# Altium PCB Copy of 智慧景区导航.PcbDoc
Units mm, origin at the board's own origin, x right, y up, seen from the top; angles counter-clockwise.
Board outline 94.01 x 87.28 mm, 2 copper layers (Top Layer, Bottom Layer); 30 components, 29 nets, 119 pads, 12 vias.
Unrouted connection lines stored in the file: 10.
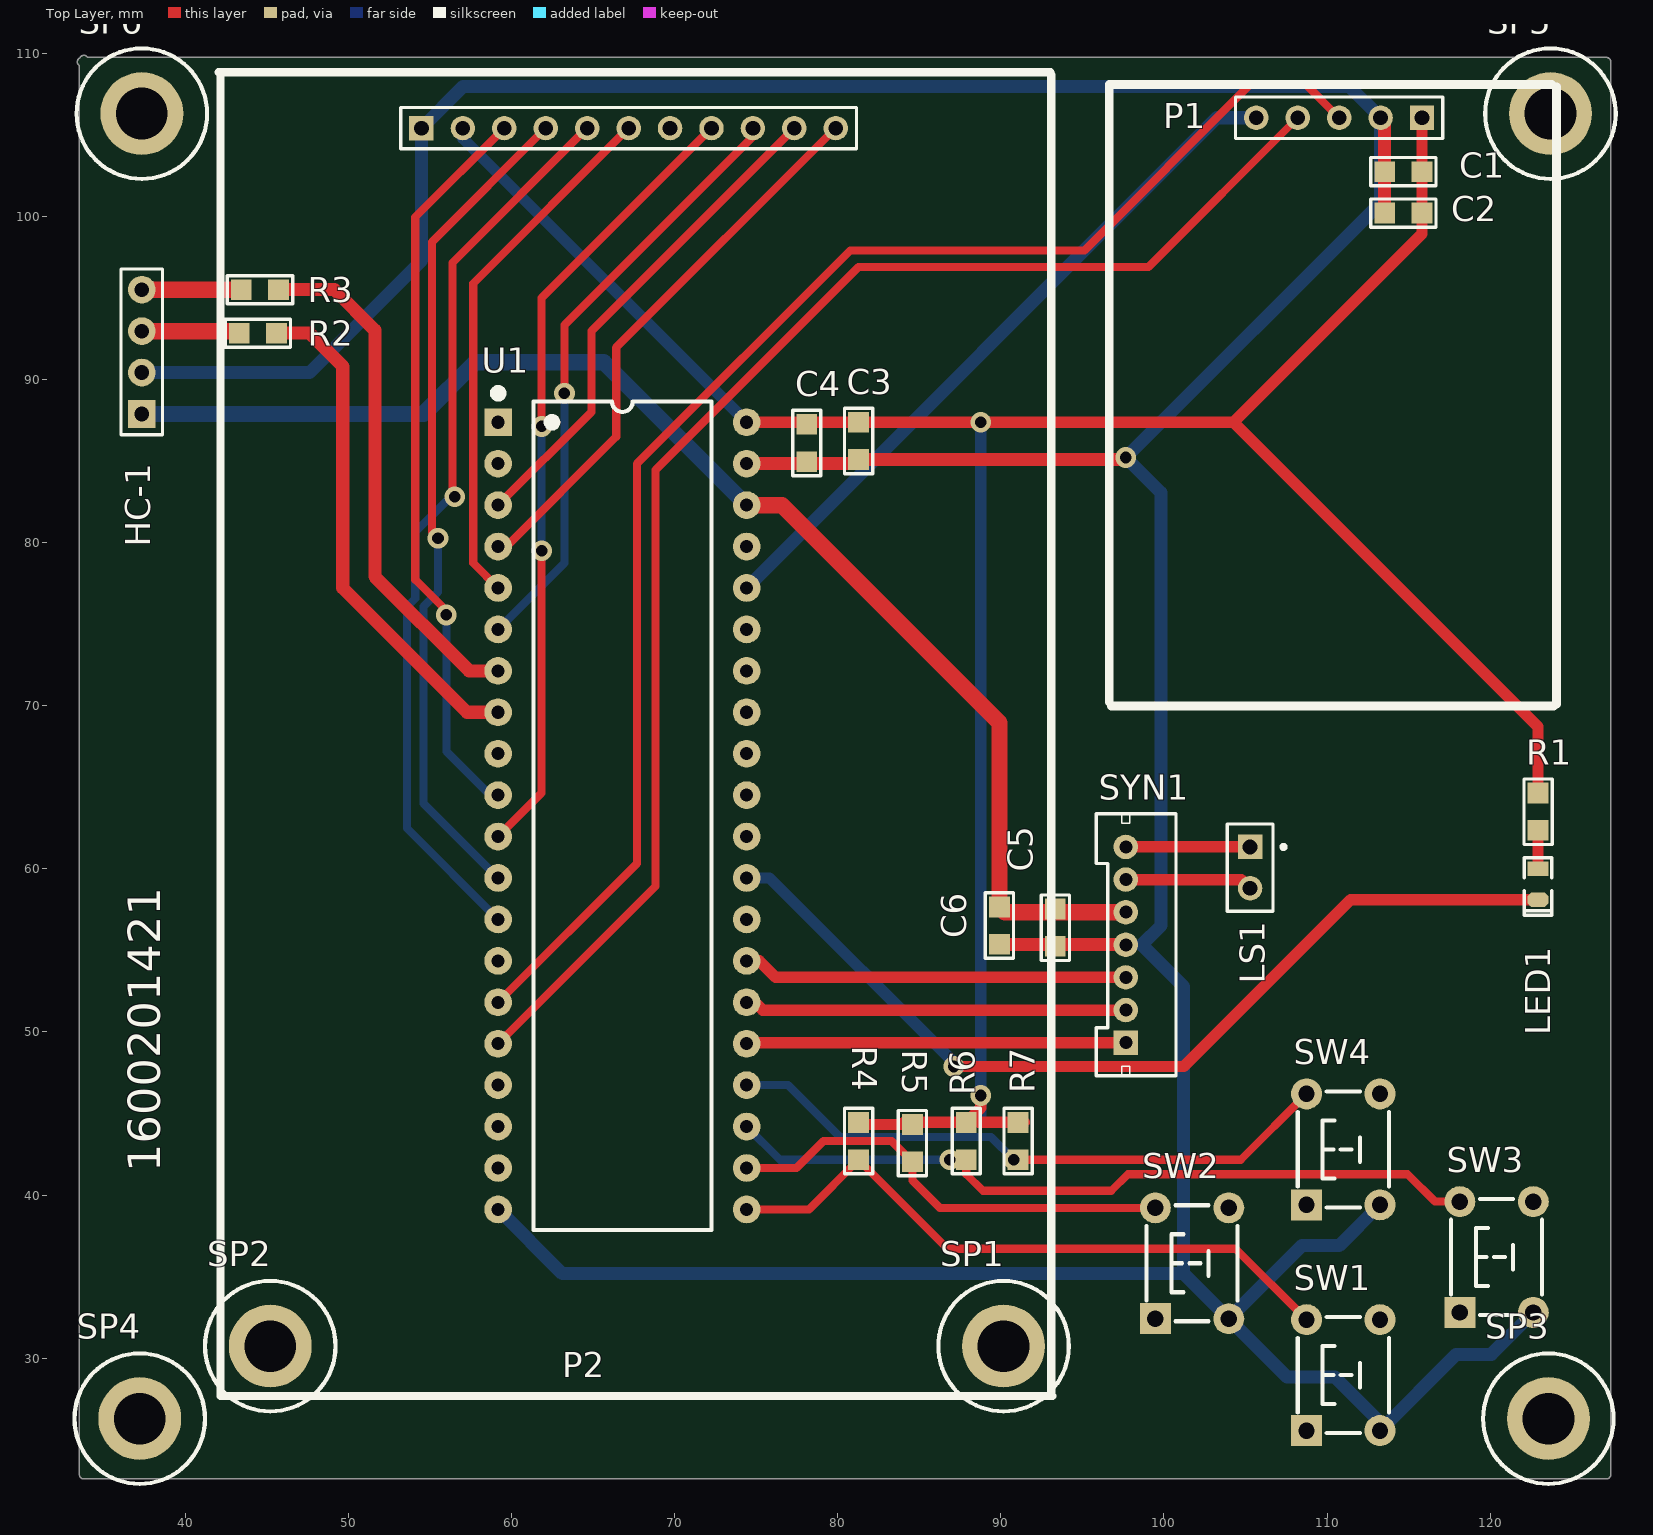
[diagram p0: Top Layer view]
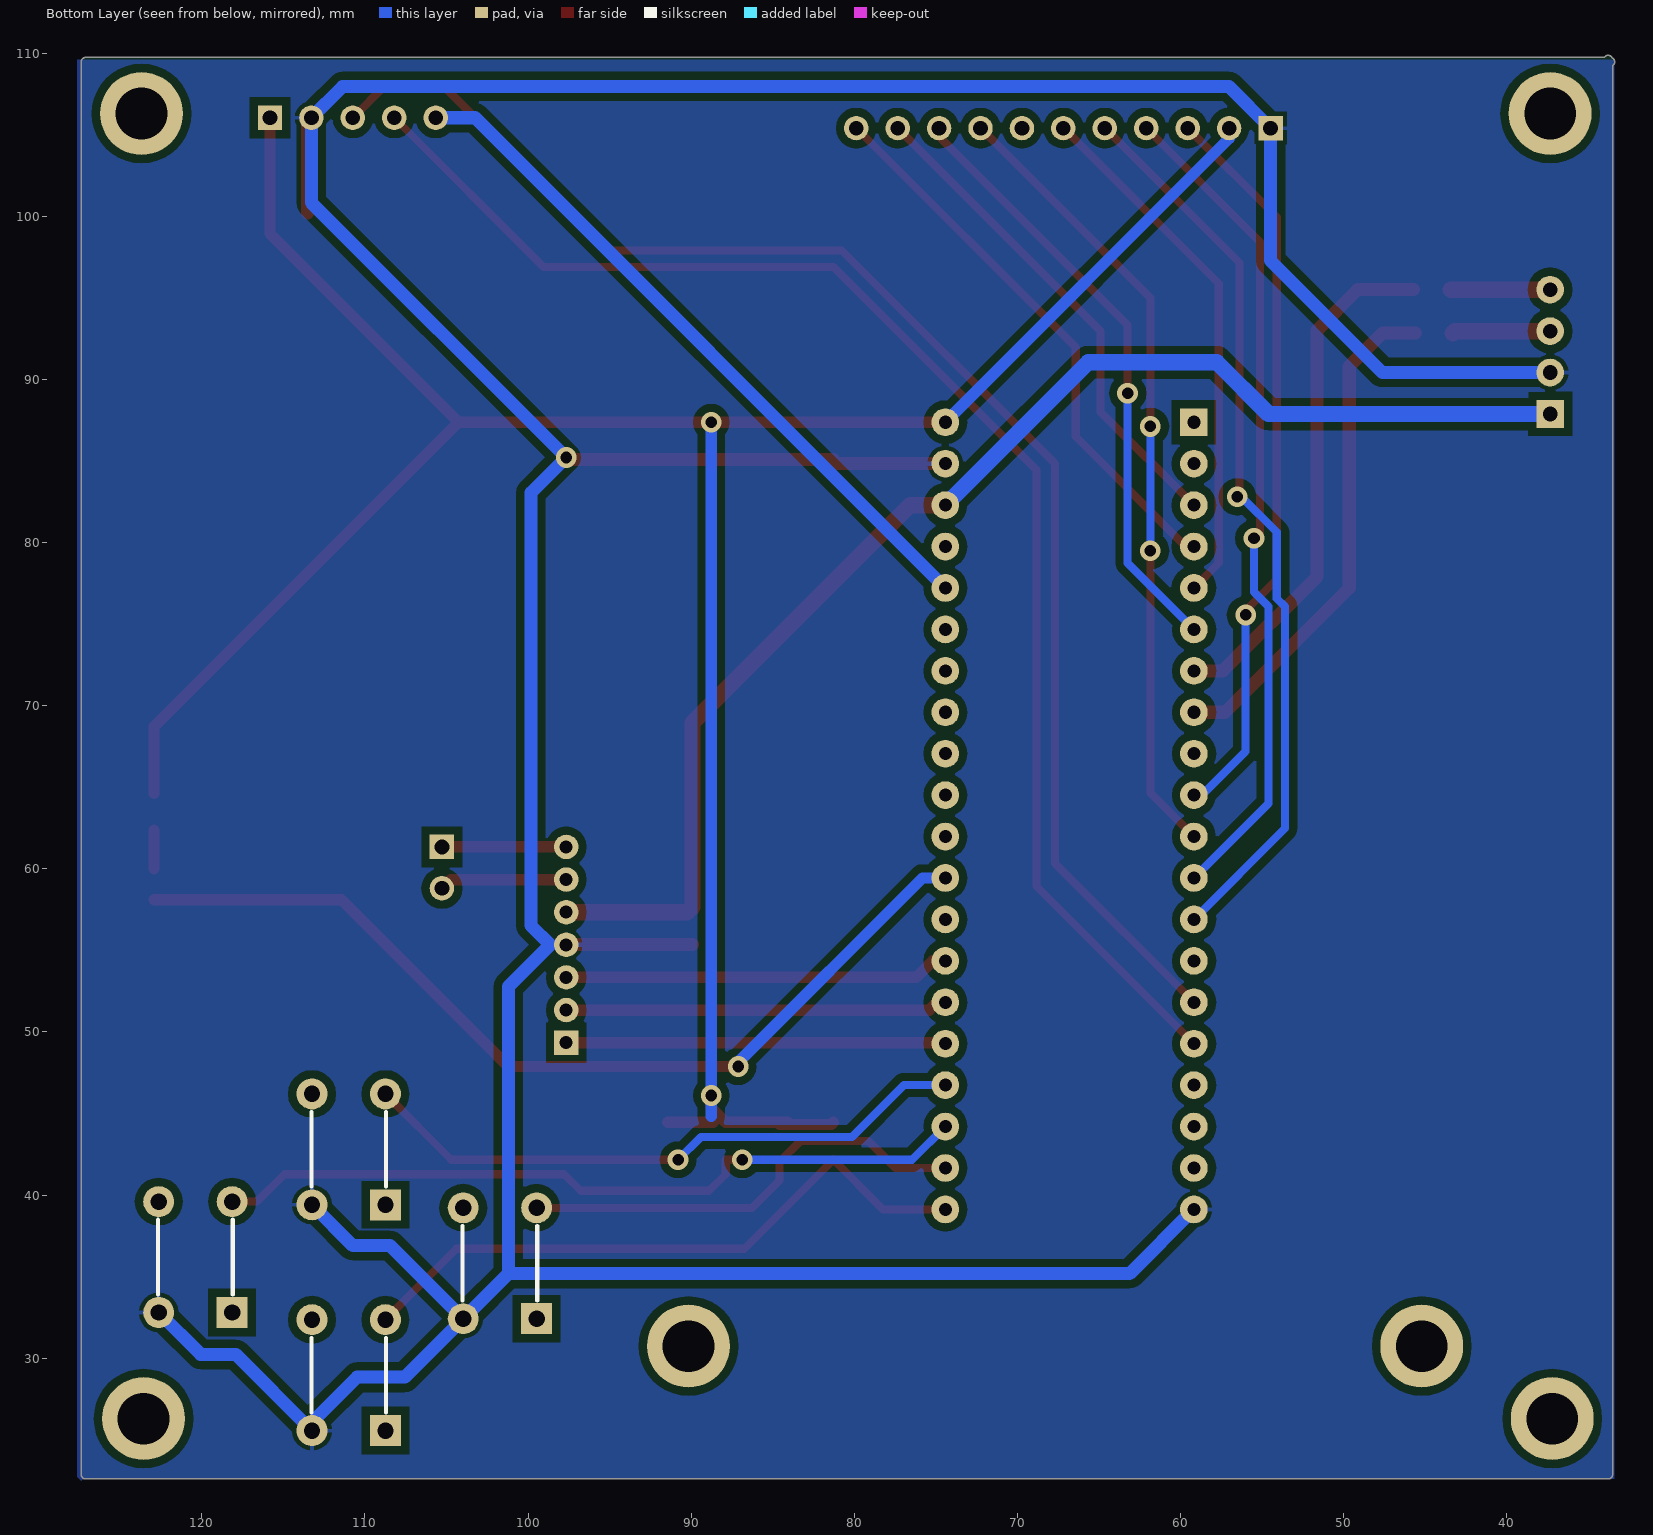
[diagram p1: Bottom Layer view, seen from below]

## Layer stack, top to bottom
Top Solder: solder mask 0.0102, Solder Resist, Dk 3.5
Top Layer: signal copper 0.0356
Dielectric 1: dielectric 0.32, FR-4, Dk 4.8
Bottom Layer: signal copper 0.0356
Bottom Solder: solder mask 0.0102, Solder Resist, Dk 3.5

## Board outline
33.512,22.86 33.512,109.245 cw(c33.655,109.474) 33.538,109.718 cw(c33.782,109.601) 34.011,109.744 127.127,109.744 cw(c127.127,109.474) 127.397,109.474 127.397,22.86 cw(c127.127,22.86) 127.127,22.59 33.782,22.59 cw(c33.782,22.86)

## Design rules (kind name [scope] priority, off if disabled: settings)
Clearance Clearance_GND [InPolygon] p1: gap=0.5 ignorepadtopadclearanceinfootprint=TRUE
Clearance [All] p2: gap=0.203 ignorepadtopadclearanceinfootprint=TRUE
HoleSize [All] p1: absolutevalues=TRUE maxlimit=3.54 minlimit=0.2 maxpercent=80.000 minpercent=20.000
PolygonConnect [All] p1: connectstyle=Relief reliefconductorwidth=0.254 reliefentries=4 polygonreliefangle="90 Angle" airgapwidth=0.254
RoutingVias [All] p1: holewidth=0.711 width=1.27 viastyle="Through Hole" minholewidth=0.711 minwidth=1.27 maxholewidth=0.711 maxwidth=1.27
SolderMaskExpansion [All] p1: expansion=0.102
Width [All] p1: maxlimit=3.54 minlimit=0.5 preferedwidth=0.8
29 further rules are at their usual default settings.

## Components (designator, comment, footprint, x,y, rotation, side; value= is the part's Value field where it differs from the comment)
C1 "10uf" "R 0805_M" 114.681,102.743 r180 top
C2 "103" "R 0805_M" 114.681,100.203 r180 top
C3 "10uf" "R 0805_M" 81.28,86.233 r270 top
C4 "103" "R 0805_M" 78.105,86.106 r270 top
C5 "10uf" "R 0805_M" 93.345,56.388 r270 top
C6 "103" "R 0805_M" 89.916,56.515 r270 top
HC-1 "HDR-1X4" HDR2.54-M-LI-4P 37.338,91.694 r90 top
LED1 "红色" "LED 0805R" 122.936,59.055 r270 top
LS1 "Speaker" PIN2 105.283,61.341 r270 top
P1 "NEO APM" HDR1X5 115.824,106.045 r180 top
P2 "TFT2.8" HDR1X11 54.483,105.41 r0 top
R1 "510R" "R 0805_M" 122.936,63.5 r90 top
R2 "100" "R 0805_M" 44.45,92.837 r0 top
R3 "100" "R 0805_M" 44.577,95.504 r0 top
R4 "10K" "R 0805_M" 81.28,43.307 r90 top
R5 "10K" "R 0805_M" 84.582,43.18 r90 top
R6 "10K" "R 0805_M" 87.884,43.307 r90 top
R7 "10K" "R 0805_M" 91.059,43.307 r90 top
SP1 "M3铜柱" M3x4_L 90.17,30.734 r0 top
SP2 "M3铜柱" M3x4_L 45.212,30.734 r0 top
SP3 "M3铜柱" M3x4_L 123.571,26.289 r0 top
SP4 "M3铜柱" M3x4_L 37.211,26.289 r0 top
SP5 "M3铜柱" M3x4_L 123.698,106.299 r0 top
SP6 "M3铜柱" M3x4_L 37.338,106.299 r0 top
SW1 "6x6x5" "TSW DIP-6*6*6" 110.998,28.956 r90 top
SW2 "6x6x5" "TSW DIP-6*6*6" 101.727,35.814 r90 top
SW3 "6x6x5" "TSW DIP-6*6*6" 120.396,36.195 r90 top
SW4 "6x6x5" "TSW DIP-6*6*6" 110.998,42.799 r90 top
SYN1 "HDR-1X7" PH2.0-LI-7P 97.663,55.34 r90 top
U1 "STM32F103C8T6核心板" DIP40-600_MH 66.802,63.246 r0 top

## Footprints (in the part's own frame and the unit in brackets; to place one, negate y for a bottom-side part, rotate by r counter-clockwise, add the part's x,y. Pads: shape width x height; smd on the part's side, far side on the other; paste and mask are expansions set on the pad)
DIP40-600_MH [mm] "带底座 52*15.2*4mm(长宽高)"
  rect 1.7x1.7 hole 0.8: 1(-7.62,24.13)
  round 1.7 hole 0.8: 2(-7.62,21.59) 3(-7.62,19.05) 4(-7.62,16.51) 5(-7.62,13.97) 6(-7.62,11.43) 7(-7.62,8.89) 8(-7.62,6.35) 9(-7.62,3.81) 10(-7.62,1.27) 11(-7.62,-1.27) 12(-7.62,-3.81) 13(-7.62,-6.35) 14(-7.62,-8.89) 15(-7.62,-11.43) 16(-7.62,-13.97) 17(-7.62,-16.51) 18(-7.62,-19.05) 19(-7.62,-21.59) 20(-7.62,-24.13) 21(7.62,-24.13) 22(7.62,-21.59) 23(7.62,-19.05) 24(7.62,-16.51) 25(7.62,-13.97) 26(7.62,-11.43) 27(7.62,-8.89) 28(7.62,-6.35) 29(7.62,-3.81) 30(7.62,-1.27) 31(7.62,1.27) 32(7.62,3.81) 33(7.62,6.35) 34(7.62,8.89) 35(7.62,11.43) 36(7.62,13.97) 37(7.62,16.51) 38(7.62,19.05) 39(7.62,21.59) 40(7.62,24.13)
  silkscreen extent -7.87,-25.4 5.46,26.16, body extent -8.9,-26.18 8.9,26.18, height 8.3
HDR1X5 [mm] "Connector; Header; 5 Position"
  rect 1.5x1.5 hole 0.9: 1(0,0)
  round 1.5 hole 0.9: 2(2.54,0) 3(5.08,0) 4(7.62,0) 5(10.16,0)
  silkscreen extent -1.27,-1.27 11.43,1.27
HDR1X11 [mm] "Connector; Header; 11 Position"
  rect 1.5x1.5 hole 0.9: 1(0,0)
  round 1.5 hole 0.9: 2(2.54,0) 3(5.08,0) 4(7.62,0) 5(10.16,0) 6(12.7,0) 7(15.24,0) 8(17.78,0) 9(20.32,0) 10(22.86,0) 11(25.4,0)
  silkscreen extent -1.27,-1.27 26.67,1.27
HDR2.54-M-LI-4P [mm] "排母，4脚"
  rect 1.7x1.7 hole 0.9: 1(-3.81,0)
  round 1.7 hole 0.9: 2(-1.27,0) 3(1.27,0) 4(3.81,0)
  silkscreen extent -5.08,-1.27 5.08,1.27, body extent -5.08,-1.27 5.08,1.27, height 8.5
"LED 0805R" [mil] "红色0805LED"
  rect 35x50 smd: 1(-37.41,0)
  oct 35x50 smd: 2(37.4,0)
  silkscreen extent -64,-33 75,33, body extent -39,-25 39,25, height 32
M3x4_L [mm] "M3铜柱，长：4mm"
  round 5.08 hole 3.175: 1(0,0)
  silkscreen extent -4,-4 4,4, body extent -2.7,-2.35 2.7,2.35, height 4.05
PH2.0-LI-7P [mm] "长：15.9mm，宽：4.7mm，高：6mm"
  rect 1.5x1.5 hole 0.8: 1(-6,0)
  round 1.5 hole 0.8: 2(-4,0) 3(-2,0) 4(0,0) 5(2,0) 6(4,0) 7(6,0)
  silkscreen extent -8.03,-3.08 8.03,1.82, body extent -7.95,-3 7.95,1.7, height 6.01
PIN2 [mm] "Photosensitive Diode; 2 Leads"
  rect 1.5x1.5 hole 0.9: 1(0,0)
  round 1.5 hole 0.9: 2(2.54,0)
  silkscreen extent -1.4,-1.4 3.94,2.18
"R 0805_M" [mil] "1/8W贴片电阻"
  rect 50x50 smd: 1(-45.01,-0.01) 2(45,0)
  silkscreen extent -79,-34 79,34, body extent -39,-25 39,25, height 20
"TSW DIP-6*6*6" [mm] "6*6*6mm"
  rect 1.9x1.9 hole 1: 1(-3.4,2.25)
  round 1.9 hole 1: 2(-3.4,-2.25) 3(3.4,-2.25) 4(3.4,2.25)
  silkscreen extent -3.56,-2.79 3.56,2.79, body extent -4.11,-3 4.11,3, height 5.95

## Part data
C1 C2 C3 C4 C5 C6: library part C-CC, "直插瓷片电容"
HC-1: library part "Header 4", "4P接插件"
LED1: library part LED-SMD, "贴片LED", BOM名称=贴片, 学习资源=www.ooocke.
LS1: "Loudspeaker", LatestRevisionDate=17-Jul-2002, LatestRevisionNote="Re-released for DXP Platform.", PackageReference=PIN2, Published=24-Mar-1999, Publisher="Altium Limited"
P1: library part "Header 5", "Header, 5-Pin", LatestRevisionDate=17-Jul-2002, LatestRevisionNote="Re-released for DXP Platform.", Publisher="Altium Limited"
P2: library part "Header 11", "Header, 11-Pin", LatestRevisionDate=17-Jul-2002, LatestRevisionNote="Re-released for DXP Platform.", Publisher="Altium Limited"
R1 R2 R3 R4 R5 R6 R7: library part R-CRR, "直插色环电阻"
SP1 SP2 SP3 SP4 SP5 SP6: library part 铜柱小焊盘, "铜柱"
SW1 SW2 SW3 SW4: library part "TSW DIP-6x6", "直插6x6轻触开关"
SYN1: library part "Header 7", "7P接插件"

## Via types
v1: diameter 1.27, hole 0.711, Top Layer to Bottom Layer, 12 vias

## Nets (pads, with @x,y where several pads share a name; then routed paths per layer and width w, separated by ;. In a path a pad name is that pad's centre, name@x,y a point inside that pad or via, vN(x,y) a via of type N, cw(c..) or ccw(c..) an arc to the next point about the centre after c; other vN are vias at no path point)
+3.3: C1.1 C2.1 C3.1 C4.1 P1.1 P2.2 R1.2 R4.2 R5.2 R6.2 R7.2 U1.40 | length 163.5
  Top Layer w0.7: U1.40 C3.1 104.267,87.376 ; R4.2 81.407,44.323 R5.2 ; R5.2@84.074,44.45 R6.2 88.773,45.339 v1(88.773,46.101) ; 88.646,44.45 R7.2 R7.2@91.44,44.45 ; P1.1 C2.1 115.824,98.933 104.267,87.376 ; R1.2 122.936,68.707 104.267,87.376
  Bottom Layer w0.7: P2.2 57.023,104.775 U1.40 ; 88.773,44.831 88.773,47.371 v1(88.773,87.376)
+5: C5.1 C6.1 HC-1.1 SYN1.5 U1.38 | length 82.2
  Top Layer w1: U1.38 76.581,82.296 89.916,68.961 C6.1 90.234,57.34 SYN1.5
  Bottom Layer w1: HC-1.1 54.61,87.884 57.785,91.059 65.659,91.059 U1.38
BUSY: SYN1.1 U1.25 | length 23.3
  Top Layer w0.7: U1.25 74.486,49.34 SYN1.1
CLK: P2.3 U1.10 | length 45.6
  Top Layer w0.5: v1(56.007,75.565) 56.007,75.819 54.102,77.724 54.102,99.949 P2.3
  Bottom Layer w0.5: v1(56.007,75.565) 56.007,67.183 58.674,64.516 U1.10
CS1: P2.9 U1.6 | length 37.2
  Top Layer w0.5: v1(63.246,89.154) 63.246,93.345 74.803,104.902 P2.9
  Bottom Layer w0.5: U1.6 63.246,78.74 v1(63.246,89.154)
CS2: P2.10 U1.3 | length 30.6
  Top Layer w0.5: U1.3 64.897,88.011 64.897,92.964 P2.10
DO: P2.6 U1.5 | length 32.8
  Top Layer w0.5: U1.5 57.658,78.74 57.658,95.885 P2.6
GND: C1.2 C2.2 C3.2 C4.2 C5.2 C6.2 HC-1.2 P1.2 P2.1 SW1.2 SW2.2 SW3.2 SW4.2 SYN1.4 U1.20 U1.39 | length 290.4
  Top Layer w0.8: U1.39 81.026,84.836 C3.2 97.536,85.09 v1(97.663,85.217) ; C6.2 97.631,55.372 SYN1.4 ; P1.2 113.538,105.791 C2.2
  Bottom Layer w0.8: HC-1.2 47.625,90.424 54.483,97.282 P2.1 57.023,107.95 111.379,107.95 P1.2 113.284,100.838 v1(97.663,85.217) 99.822,83.058 99.822,56.515 98.647,55.34 101.212,52.775 101.212,35.179 ; U1.20 63.119,35.179 101.212,35.179 ; SW4.2@113.248,39.152 SW4.2 110.744,36.895 108.458,36.895 SW2.2 ; SW3.2 120.077,30.226 117.918,30.226 SW1.2 113.248,26.071 110.49,28.829 107.562,28.829 SW2.2 ; 101.212,35.179 SW2.2
MISO: P2.8 U1.11 | length 48.9
  Top Layer w0.5: U1.11 61.849,64.643 v1(61.849,79.502) ; v1(61.849,87.122) 61.849,94.996 P2.8
  Bottom Layer w0.5: v1(61.849,79.502) v1(61.849,87.122)
MOSI: P2.4 U1.12 | length 51.3
  Top Layer w0.5: v1(55.499,80.264) 55.118,80.645 55.118,98.425 P2.4
  Bottom Layer w0.5: v1(55.499,80.264) 55.499,76.962 54.61,76.073 54.61,64.008 U1.12
NetHC-1_3: HC-1.3 R2.1 | length 6
  Top Layer w1: HC-1.3 43.18,92.964 R2.1
NetHC-1_4: HC-1.4 R3.1 | length 6.1
  Top Layer w1: HC-1.4 R3.1
NetLED1_1: LED1.1 R1.1 | length 2.4
  Top Layer w0.7: LED1.1 R1.1
NetLED1_2: LED1.2 U1.29 | length 57.7
  Top Layer w0.7: v1(87.122,47.879) 101.219,47.879 111.445,58.105 LED1.2
  Bottom Layer w0.7: U1.29 75.819,59.436 87.122,48.133 v1(87.122,47.879)
NetLS1_1: LS1.1 SYN1.7 | length 7.6
  Top Layer w0.7: SYN1.7 LS1.1 LS1.1
NetLS1_2: LS1.2 SYN1.6 | length 7.8
  Top Layer w0.7: SYN1.6 104.744,59.34 LS1.2
PEN: P2.11 U1.4 | length 34.5
  Top Layer w0.5: U1.4 59.69,79.756 66.421,86.487 66.421,91.948 P2.11
PPS: P1.5 U1.36 | length 43.2
  Bottom Layer w0.8: U1.36 103.251,106.045 P1.5
RES: P2.5 U1.13 | length 55.7
  Top Layer w0.5: v1(56.515,82.804) 56.388,82.931 56.388,97.155 P2.5
  Bottom Layer w0.5: v1(56.515,82.804) 56.261,82.804 54.102,80.645 54.102,76.581 53.594,76.073 53.594,62.484 U1.13
RX1: SYN1.3 U1.27 | length 23.7
  Top Layer w0.7: U1.27 75.184,54.356 76.2,53.34 SYN1.3
RX2: R2.2 U1.8 | length 31.2
  Top Layer w0.8: R2.2 47.625,92.837 49.657,90.805 49.657,77.216 57.277,69.596 U1.8
RX3: P1.4 U1.16 | length 87.5
  Top Layer w0.5: U1.16 68.834,58.928 68.834,84.455 81.28,96.901 99.06,96.901 P1.4
SW1: R4.1 SW1.4 U1.21 | length 39.7
  Top Layer w0.5: U1.21 78.232,39.116 R4.1 86.741,36.703 104.401,36.703 SW1.4
SW2: R5.1 SW2.4 U1.22 | length 28.1
  Top Layer w0.5: U1.22 77.47,41.656 79.121,43.307 83.312,43.307 R5.1 84.582,40.894 86.262,39.214 SW2.4
SW3: R6.1 SW3.4 U1.23 | length 47
  Top Layer w0.5: v1(86.868,42.164) R6.1 87.884,41.275 88.9,40.259 96.774,40.259 97.79,41.275 114.935,41.275 116.615,39.595 SW3.4
  Bottom Layer w0.5: U1.23 76.454,42.164 v1(86.868,42.164)
SW4: R7.1 SW4.4 U1.24 | length 37.9
  Top Layer w0.5: v1(90.805,42.164) R7.1 104.713,42.164 SW4.4
  Bottom Layer w0.5: U1.24 76.962,46.736 80.137,43.561 89.408,43.561 v1(90.805,42.164)
TX1: SYN1.2 U1.26 | length 23.4
  Top Layer w0.7: U1.26 74.93,51.816 75.406,51.34 SYN1.2
TX2: R3.2 U1.7 | length 32
  Top Layer w0.8: R3.2 49.149,95.504 51.625,93.027 51.625,77.915 57.404,72.136 U1.7
TX3: P1.3 U1.15 | length 90.1
  Top Layer w0.5: U1.15 67.691,60.325 67.691,84.836 80.772,97.917 95.123,97.917 105.283,108.077 108.712,108.077 P1.3
pads on no net: P2.7 SP1.1 SP2.1 SP3.1 SP4.1 SP5.1 SP6.1 SW1.1 SW1.3 SW2.1 SW2.3 SW3.1 SW3.3 SW4.1 SW4.3 U1.1 U1.2 U1.9 U1.14 U1.17 U1.18 U1.19 U1.28 U1.30 U1.31 U1.32 U1.33 U1.34 U1.35 U1.37

## Polygon pours and split planes (outlines as drawn)
GND on Bottom Layer "Bottom Layer-GND" (solid, pour order 2): 33.528,109.728 33.401,109.601 33.401,22.606 127.254,22.606 127.381,22.479 127.635,22.733 127.635,109.601 33.528,109.601

## Silkscreen, mask and mechanical layers (free items; w line width, h text height)
Top Overlay:
  lines w0.5: 42.037,108.839 93.037,108.839 ; 42.164,27.686 93.164,27.686 ; 42.164,27.813 42.164,108.813 ; 93.091,27.686 93.091,108.686
  lines w0.54: 96.647,70.231 96.647,108.077 123.774,108.077 ; 96.774,69.977 123.901,69.977 ; 124.079,70.104 124.079,107.95
  text "1600201421" at 38.481,41.402 h2 r90
Mechanical 1:
  lines w0.54: 33.782,24.384 33.782,108.077 35.179,109.474 125.857,109.474 127.127,108.204 127.127,24.384 125.603,22.86 35.306,22.86 33.782,24.384